# Altium PCB PCB1.PcbDoc
Units mm, origin at the board's own origin, x right, y up, seen from the top; angles counter-clockwise.
Board outline 55.5 x 62.48 mm, 2 copper layers (Top Layer, Bottom Layer); 13 components, 14 nets, 72 pads, 0 vias.
Unrouted connection lines stored in the file: 2.
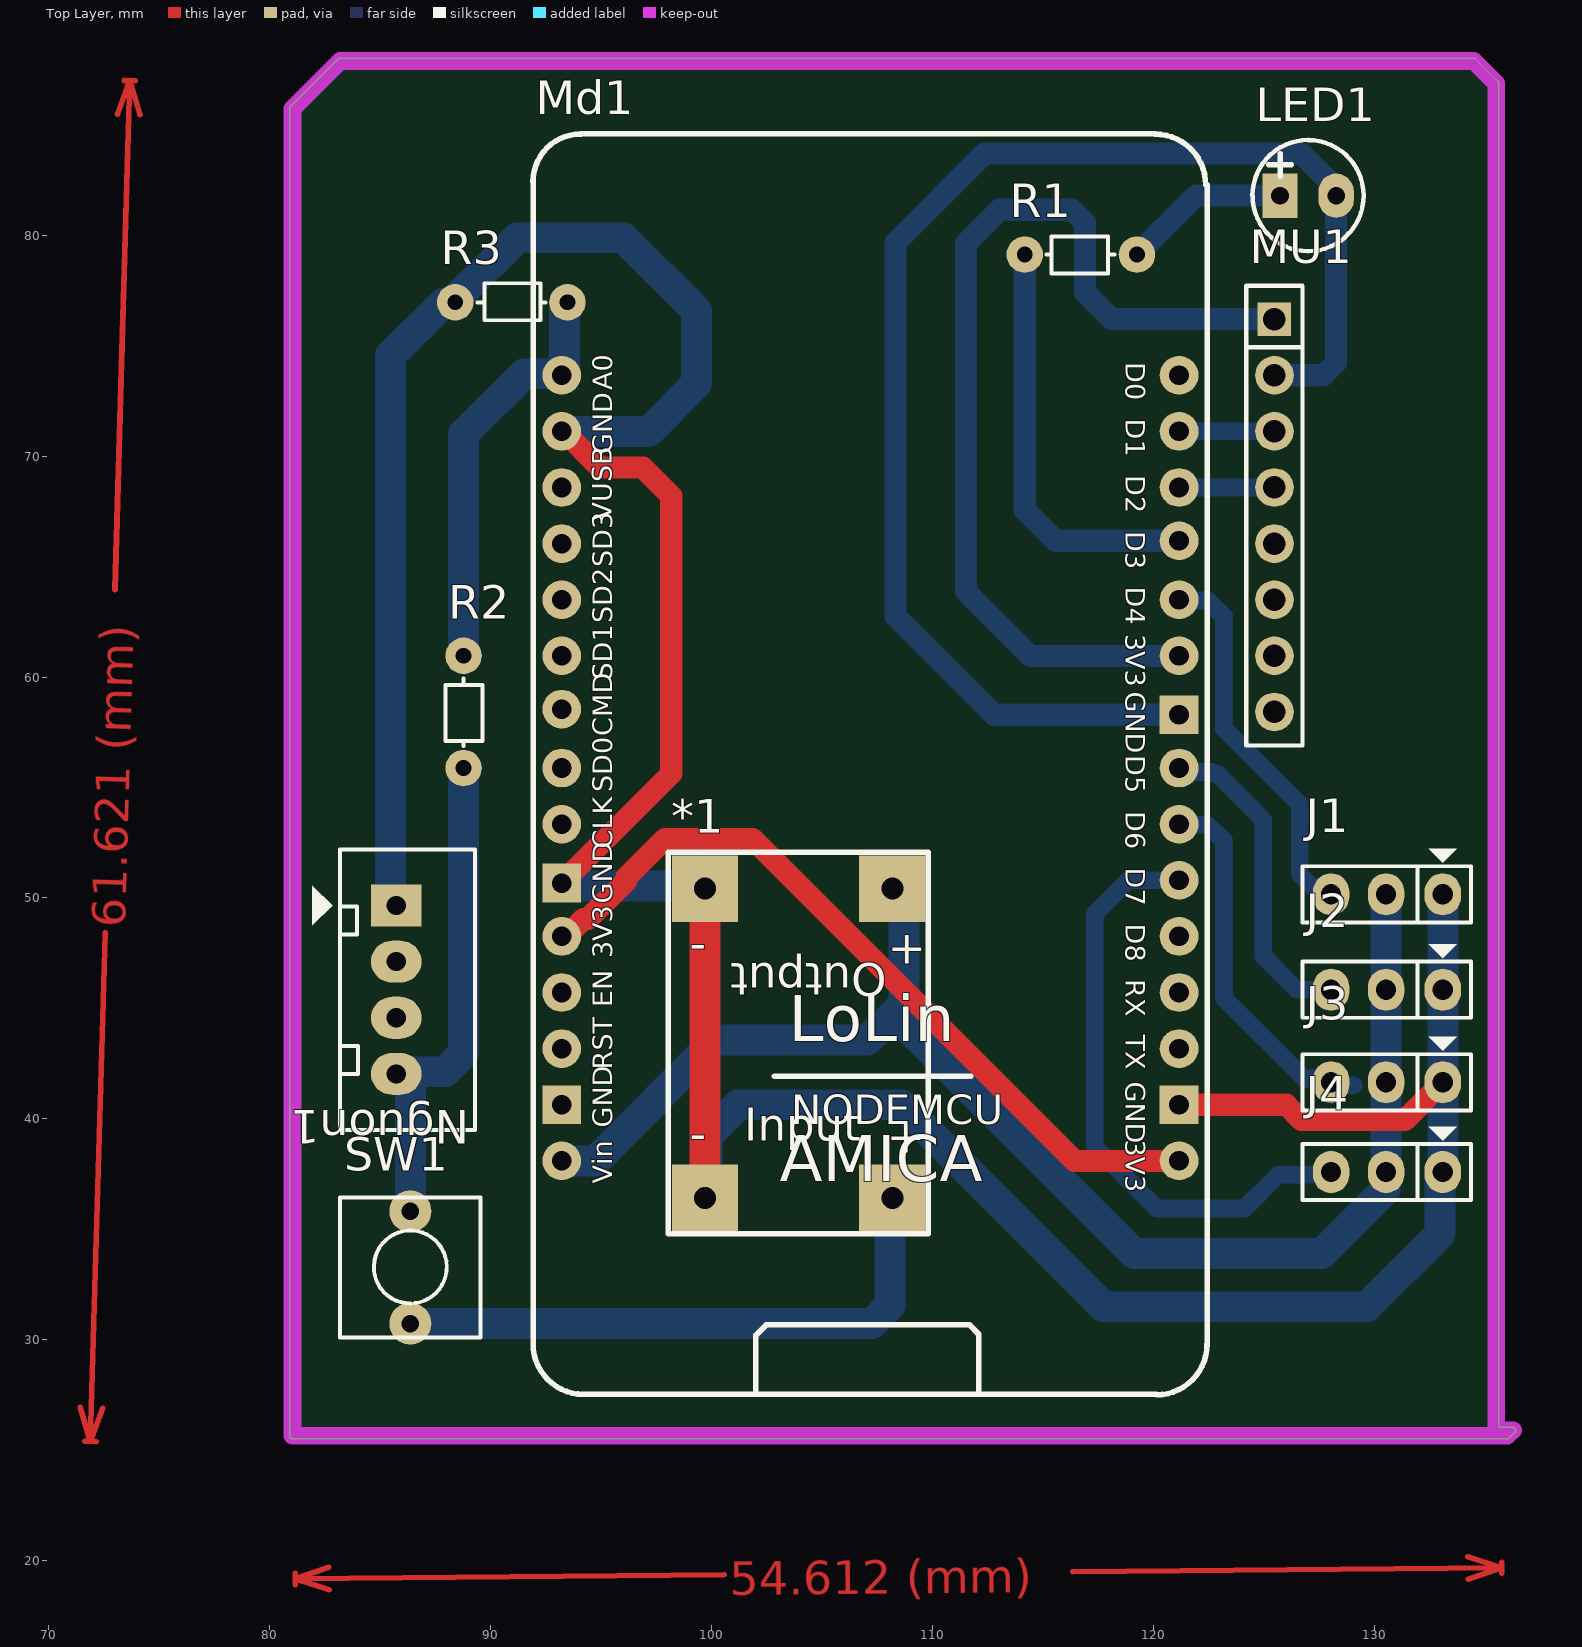
[diagram p0: Top Layer view]
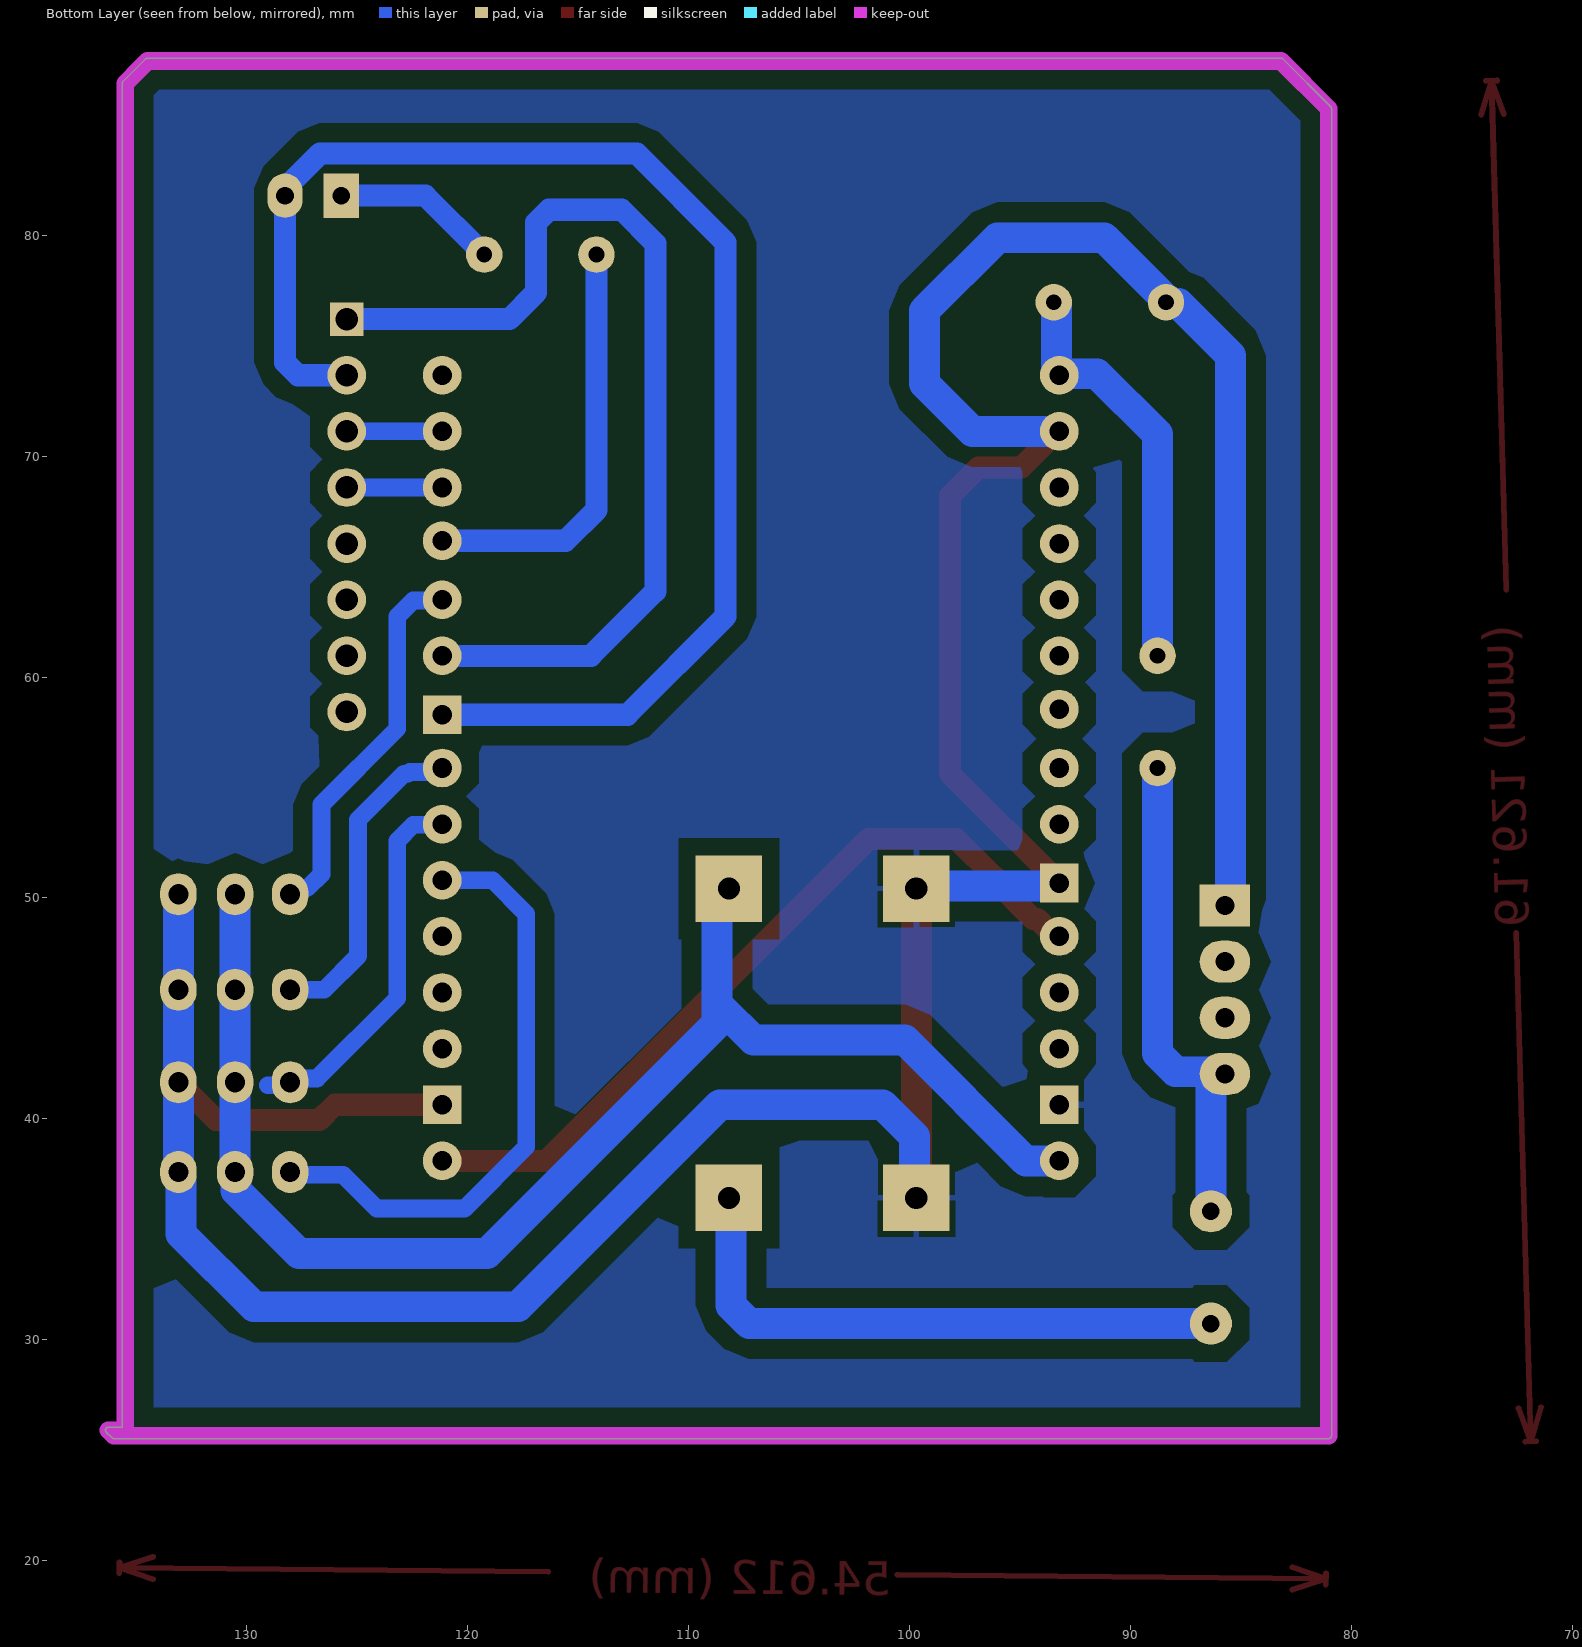
[diagram p1: Bottom Layer view, seen from below]
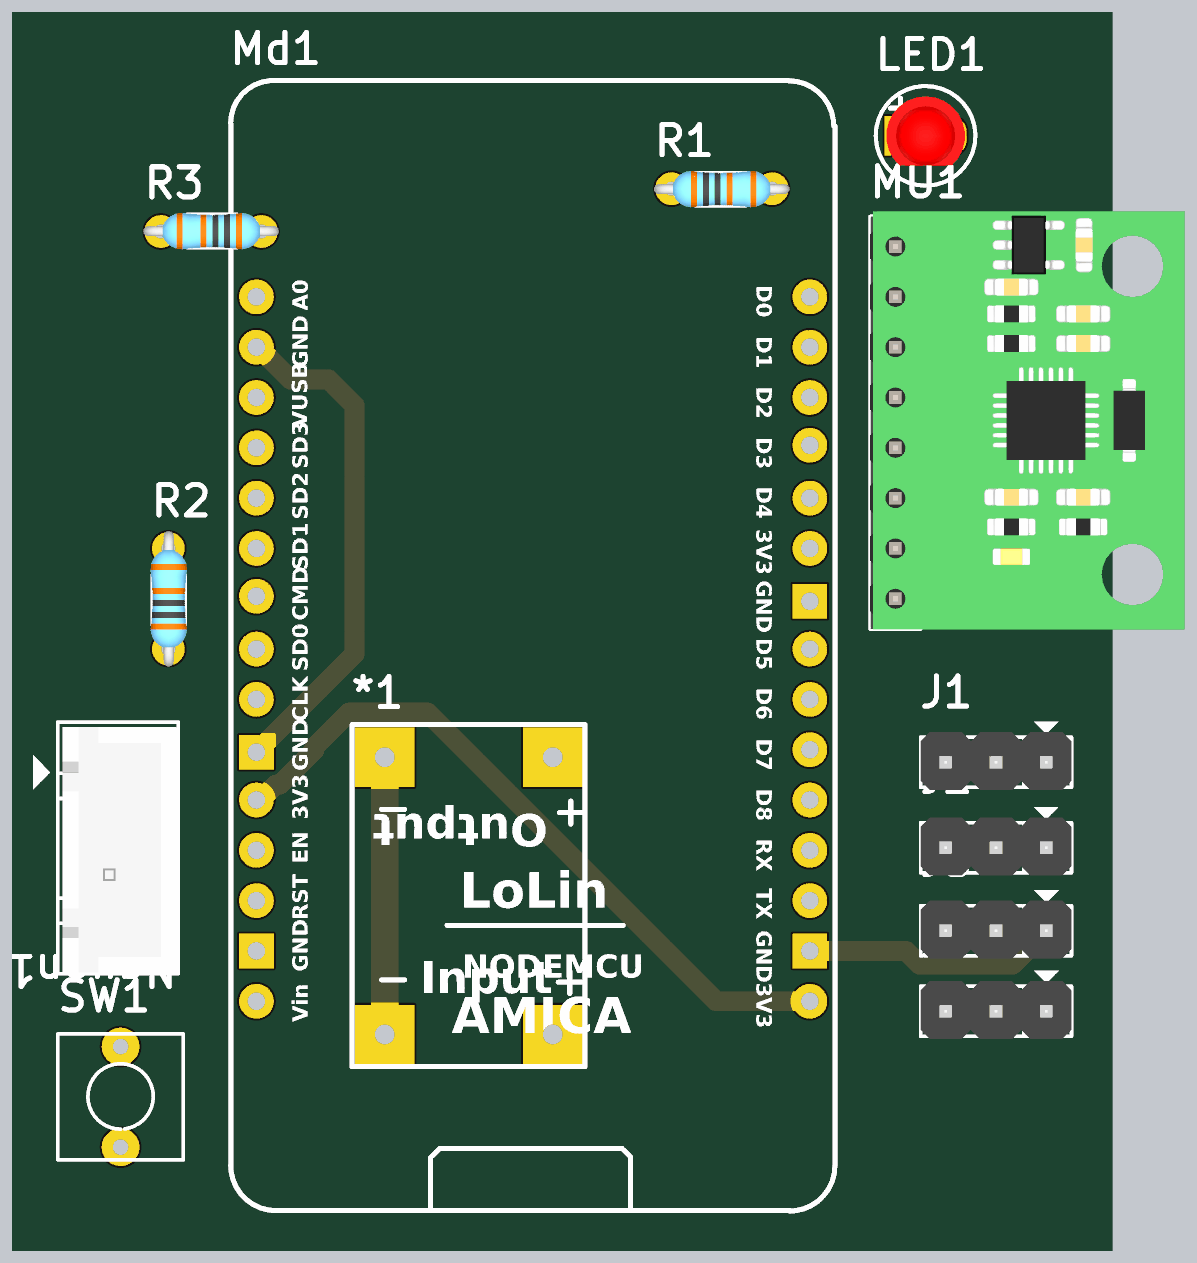
[diagram p2: 3D render of the assembled board from above, using the file's embedded part models]

## Layer stack, top to bottom
Top Solder: solder mask 0.0102, Solder Resist, Dk 3.5
Top Layer: signal copper 0.0356
Dielectric 1: dielectric 0.32, FR-4, Dk 4.8
Bottom Layer: signal copper 0.0356
Bottom Solder: solder mask 0.0102, Solder Resist, Dk 3.5

## Board outline
80.899,25.654 80.899,85.725 cw(c81.026,85.725) 80.936,85.816 80.936,85.815 83.095,87.974 83.094,87.974 cw(c83.185,87.884) 83.185,88.011 134.493,88.011 cw(c134.493,87.884) 134.584,87.974 134.583,87.974 135.599,86.958 135.599,86.959 cw(c135.509,86.868) 135.636,86.868 135.636,26.035 136.271,26.035 cw(c136.271,25.908) 136.398,25.908 cw(c136.271,25.908) 136.361,25.817 136.361,25.818 136.107,25.564 136.108,25.564 cw(c136.017,25.654) 136.017,25.527 81.026,25.527 cw(c81.026,25.654)

## Design rules (kind name [scope] priority, off if disabled: settings)
Clearance [All] p1: gap=0.8 ignorepadtopadclearanceinfootprint=FALSE
PolygonConnect [All] p1: connectstyle=Relief reliefconductorwidth=0.254 reliefentries=4 polygonreliefangle="90 Angle" airgapwidth=0.254
RoutingVias [All] p1: holewidth=0.711 width=1.27 viastyle="Through Hole" minholewidth=0.711 minwidth=1.27 maxholewidth=0.711 maxwidth=1.27
SolderMaskExpansion [All] p1: expansion=0.102 istentingtop=FALSE
Width [All] p1: maxlimit=1.5 minlimit=0.7 preferedwidth=1
30 further rules are at their usual default settings.

## Classes and differential pairs
component class Sheet2: *1 J1 J2 J3 J4 LED1 Md1 Nguon1 R1 R2 R3 SW1

## Components (designator, comment, footprint, x,y, rotation, side; value= is the part's Value field where it differs from the comment)
*1 "Mini-360 DC-DC" Mini-360 103.835,42.954 r0 top
J1 "Jumper 3" JP3 130.556,50.165 r180 top value=J3
J2 "Jumper 3" JP3 130.556,45.847 r180 top value=J3
J3 "Jumper 3" JP3 130.556,41.656 r180 top value=J3
J4 "Jumper 3" JP3 130.556,37.592 r180 top value=J3
LED1 "LED3" LED3mm 127,81.788 r0 top
Md1 "Node MCU 8266" NODEMCU_ESP8266_CH340 93.218,73.66 r0 top
MU1 "MPU6050" MPU6050 132.969,70.612 r270 top
Nguon1 "JP4" CON4 85.725,49.657 r270 top value="Connector 4"
R1 "47k" R1/8W 116.713,79.121 r180 top value="R1/4W - 1K"
R2 "47k" R1/8W 88.773,58.42 r270 top value="R1/4W - 1K"
R3 "10k" R1/8W 90.932,76.962 r0 top value="R1/4W - 1K"
SW1 "SW" SW2 86.36,35.814 r270 top value="SW chip 2 pin"

## Footprints (in the part's own frame and the unit in brackets; to place one, negate y for a bottom-side part, rotate by r counter-clockwise, add the part's x,y. Pads: shape width x height; smd on the part's side, far side on the other; paste and mask are expansions set on the pad)
CON4 [mil] "CON4"
  rect 75x90 hole 34: 1(0,0)
  oval 75x90 hole 34: 2(100,0) 3(200,0) 4(300,0)
  silkscreen extent -100,-150 400,140, body extent -90,-90 398,136, height 276
JP3 [mil] "Jumper 3"
  oval 65x75 hole 36: 1(-100,0) 2(1,0) 3(99,0)
  silkscreen extent -150,-81 150,50, body extent -150,-60 150,55, height 355
LED3mm [mm]
  rect 1.6x2 hole 0.8: 1(-1.27,0)
  oval 1.6x2 hole 0.8: 2(1.27,0)
  silkscreen extent -2.52,-2.51 2.51,2.52, body extent -1.99,-1.5 1.99,1.99, height 5.38
Mini-360 [mm] "DC-DC Power source"
  rect 3x3 hole 1: 1(-4.14,-6.53) 1(-4.14,-6.53) 2(4.344,-6.53) 2(4.344,-6.53) 3(-4.14,7.465) 4(4.344,7.465)
  silkscreen extent -5.79,-8.16 5.97,9.12
MPU6050 [mm]
  rect 1.52x1.52 hole 1.02: 1(-5.588,-7.493)
  round 0 all layers, no hole: 2(-4.572,4.445) 2(10.922,4.572)
  round 1.75 hole 1.02: 2(-3.048,-7.493) 3(-0.508,-7.493) 4(2.032,-7.493) 5(4.572,-7.493) 6(7.112,-7.493) 7(9.652,-7.493) 8(12.192,-7.493)
  silkscreen extent -7.11,-8.76 13.71,-6.22, body extent -7.37,-8.76 13.74,7.11, height 14.54
NODEMCU_ESP8266_CH340 [mil] "NODEMCU_ESP8266_CH340"
  round 69 hole 35: 3V3(0,-1000) 3V3(1100,-1400) 3V3(1100,-500) A0(0,0) CLK(0,-800) CMD(0,-595) D0(1100,0) D1(1100,-100) D2(1100,-200) D3(1100,-295) D4(1100,-400) D5(1100,-700) D6(1100,-800) D7(1100,-900) D8(1100,-1000) EN(0,-1100) GND(0,-100) RST(0,-1200) RX(1100,-1100) SD0(0,-700) SD1(0,-500) SD2(0,-400) SD3(0,-300) TX(1100,-1200) VIN(0,-1400) VUSB(0,-200)
  rect 69x69 hole 35: GND(0,-1300) GND(0,-905) GND(1100,-1300) GND(1100,-605)
  silkscreen extent -51,-1817 1150,430
R1/8W [mil] "R 1/8W, 2 pin, 200mil"
  round 65 hole 28: 1(-100,0) 2(100,0)
  silkscreen extent -60,-32 61,34, body extent -135,-35 135,37, height 86
SW2 [mil] "SW button 2pin, 250x 250 mil"
  round 75 hole 31: 1(0,0) 2(200,0)
  silkscreen extent -25,-125 225,125

## Part data
J1 J2 J3 J4: library part JP3
LED1: library part "LED 3mm", "LED 3mm"
Md1: library part NodeMCU_ESP8266
MU1: Manufacturer="W¨¹rth Elektronik eiSos GmbH", partNo=613004143121, ComponentLink1 Description=Manufacturer, ComponentLink1URL=http://www.we-online.com, ComponentLink2 Description=Datasheet, ComponentLink2URL=http://katalog.we-online.de/em/datasheet/6130xx143121.pdf, Created by="Karrer Zheng", Created Date="29 March 2013", NoPins=04
Nguon1: library part Con4, "Connector 4"
R1 R2 R3: library part R, "Resistor 1/4W"
SW1: library part SW2, "Switch button 2 pin"

## Nets (pads, with @x,y where several pads share a name; then routed paths per layer and width w, separated by ;. In a path a pad name is that pad's centre, name@x,y a point inside that pad or via, vN(x,y) a via of type N, cw(c..) or ccw(c..) an arc to the next point about the centre after c; other vN are vias at no path point)
+5: *1.4 J1.2 J2.2 J3.2 J4.2 Md1.VIN | length 65.2
  Bottom Layer w1.4: Md1.VIN 94.742,38.1 100.203,43.561 107.061,43.561 108.458,44.958 ; *1.4 108.712,49.886 108.712,44.323 119.126,33.909 127.635,33.909 130.483,36.757 130.483,37.544 J4.2 ; J4.2@130.531,37.438 J3.2 J2.2 J1.2
+12: Nguon1.4 R2.2 SW1.1 | length 21.4
  Bottom Layer w1.4: Nguon1.4 85.822,42.134 87.953,42.134 88.773,42.954 R2.2@88.773,55.304 ; SW1.1 Nguon1.4@86.36,41.402
esc1: J1.3 Md1.D4 | length 17.2
  Bottom Layer w0.8: Md1.D4 121.191,63.467 122.461,63.467 123.19,62.738 123.19,57.658 126.619,54.229 126.619,51.071 127.236,50.455 127.752,50.455 J1.3
esc2: J2.3 Md1.D5 | length 14.7
  Bottom Layer w0.8: Md1.D5 121.34,55.698 122.628,55.698 122.701,55.624 122.882,55.624 124.968,53.538 124.968,47.371 126.492,45.847 J2.3
esc3: J3.3 Md1.D6 | length 17
  Bottom Layer w0.8: Md1.D6 121.191,53.307 122.461,53.307 123.19,52.578 123.19,45.466 126.825,41.831 127.739,41.831 128.041,41.529 129.051,41.529
esc4: J4.3 Md1.D7 | length 27.5
  Bottom Layer w0.8: Md1.D7 118.872,50.8 117.348,49.276 117.348,38.735 120.142,35.941 124.118,35.941 125.642,37.465 127.914,37.465 J4.3
GND: *1.1 *1.3 J1.1 J2.1 J3.1 J4.1 LED1.2 Md1.GND MU1.2 Nguon1.1 R3.1 | length 233.9
  Top Layer w1: Md1.GND@93.218,50.673 98.171,55.626 98.171,68.199 96.885,69.485 94.944,69.485 93.309,71.12 Md1.GND@93.218,71.12 ; Md1.GND@121.158,40.64 126.014,40.64 126.705,39.949 131.387,39.949 133.093,41.656 J3.1
  Top Layer w1.4: *1.1@99.695,36.424 *1.3
  Bottom Layer w1: Md1.GND@121.158,58.293 112.776,58.293 108.331,62.738 108.331,79.674 112.35,83.693 126.691,83.693 128.27,82.114 128.27,74.246 127.684,73.66 MU1.2@125.476,73.66
  Bottom Layer w1.4: Nguon1.1 85.723,49.657 85.471,49.909 85.471,74.549 87.836,76.914 88.149,76.914 R3.1@88.283,77.047 ; R3.1 88.392,77.03 88.517,77.155 88.517,77.214 91.186,79.883 96.012,79.883 99.314,76.581 99.314,73.279 97.155,71.12 Md1.GND@93.218,71.12 ; Md1.GND@93.218,50.673 93.345,50.546 99.568,50.546 *1.3 ; *1.1@99.695,36.424 99.782,36.511 99.782,39.203 101.219,40.64 108.585,40.64 117.729,31.496 129.667,31.496 132.969,34.798 132.969,37.27 133.096,37.397 J4.1 J3.1 J2.1 J1.1
led: Md1.D3 R1.2 | length 19.1
  Bottom Layer w1: R1.2 114.173,67.564 115.57,66.167 Md1.D3
Net*1_2: *1.2 SW1.2 | length 27.2
  Bottom Layer w1.4: SW1.2 107.257,30.734 108.077,31.554 *1.2@108.077,36.712
NetLED1_1: LED1.1 R1.1 | length 7.6
  Bottom Layer w1: R1.1 121.92,81.788 LED1.1
NetMd1_A0: Md1.A0 R2.1 R3.2 | length 19
  Bottom Layer w1.4: R2.1 88.773,70.993 91.507,73.727 93.151,73.727 Md1.A0 93.285,73.727 93.285,73.977 93.345,74.036 93.345,76.767 93.472,76.894 R3.2
scl: Md1.D1 MU1.3 | length 4.5
  Bottom Layer w0.8: Md1.D1 MU1.3
  Bottom Layer w1.1: Md1.D1 Md1.D1@121.283,70.995
sda: Md1.D2 MU1.4 | length 4.5
  Bottom Layer w0.8: Md1.D2 MU1.4
  Bottom Layer w1.1: Md1.D2 Md1.D2@121.283,68.455
VCC: Md1.3V3 MU1.1 | length 81
  Top Layer w1: Md1.3V3@93.218,48.26 93.422,48.26 94.204,49.043 94.407,49.043 96.145,50.781 96.145,50.935 97.883,52.673 101.858,52.673 116.431,38.1 Md1.3V3@121.158,38.1
  Bottom Layer w1: Md1.3V3@121.158,60.96 114.427,60.96 111.506,63.881 111.506,79.629 113.03,81.153 116.317,81.153 116.903,80.567 116.903,77.407 118.11,76.2 MU1.1
pads on no net: Md1.CLK Md1.CMD Md1.D0 Md1.D8 Md1.EN Md1.RST Md1.RX Md1.SD0 Md1.SD1 Md1.SD2 Md1.SD3 Md1.TX Md1.VUSB MU1.5 MU1.6 MU1.7 MU1.8 Nguon1.2 Nguon1.3
copper on no net: | length 99.8
  Top Layer w0.254: 71.418,26.938 71.882,25.4 ; 71.628,25.407 72.136,25.393 ; 72.434,26.909 71.882,25.4 ; 72.547,48.431 71.882,25.4 ; 72.995,63.964 73.66,86.995 ; 73.108,85.486 73.66,86.995 ; 73.406,87.002 73.914,86.988 ; 74.124,85.457 73.66,86.995 ; 81.151,19.431 81.155,18.923 ; 82.672,19.699 81.153,19.177 ; 82.682,18.683 81.153,19.177 ; 100.561,19.358 81.153,19.177 ; 116.355,19.504 135.763,19.685 ; 134.234,20.179 135.763,19.685 ; 134.244,19.163 135.763,19.685 ; 135.761,19.939 135.765,19.431

## Polygon pours and split planes (outlines as drawn)
GND on Bottom Layer "GND_L02_P000" (solid, remove dead copper, pour order 0): 80.645,88.265 80.899,88.519 135.636,88.519 135.636,25.654 135.382,25.4 135.001,25.781 80.264,25.781

## Keep-outs
Keep-Out Layer:
  lines w0.8: 81.026,25.654 136.017,25.654 136.271,25.908 135.509,25.908 135.509,86.868 134.81,87.566 135.255,87.122 134.493,87.884 83.185,87.884 81.026,85.725 81.026,25.654

## Other copper
Top Layer:
  text "61.621 (mm)" at 73.468,48.658 h1.52 r88.35
  text "54.612 (mm)" at 100.824,18.446 h1.52 r0.53

## Text inside footprints (layer, text, board x,y; h text height)
*1: Top Overlay "-" at 99.008,38.586 h1.52; Top Overlay "Input" at 101.473,38.506 h2.54; Top Overlay "Output" at 107.925,47.549 h2.54 r180; Top Overlay "+" at 107.926,38.471 h1.52; Top Overlay "+" at 107.976,47.031 h1.52; Top Overlay "-" at 99.008,47.197 h1.52
Md1: Top Overlay "LoLin" at 103.48,42.824 h3.56; Top Overlay "AMICA" at 103.073,36.5 h3.56; Top Overlay "NODEMCU" at 103.607,39.294 h2.29; Top Overlay "CLK" at 95.807,52.222 h1.52 r90; Top Overlay "SD0" at 95.807,54.773 h1.52 r90; Top Overlay "SD1" at 95.807,59.875 h1.52 r90; Top Overlay "SD2" at 95.807,62.426 h1.52 r90; Top Overlay "SD3" at 95.807,64.977 h1.52 r90; Top Overlay "VUSB" at 95.781,67.081 h1.52 r90; Top Overlay "GND" at 95.807,70.079 h1.52 r90; Top Overlay "A0" at 95.807,72.974 h1.52 r90; Top Overlay "D5" at 118.461,56.448 h1.52 r270; Top Overlay "GND" at 118.461,59.344 h1.52 r270; Top Overlay "3V3" at 118.461,61.935 h1.52 r270; Top Overlay "D4" at 118.461,64.094 h1.52 r270; Top Overlay "D3" at 118.461,66.594 h1.52 r270; Top Overlay "D2" at 118.461,69.134 h1.52 r270; Top Overlay "D1" at 118.461,71.68 h1.52 r270; Top Overlay "D0" at 118.461,74.254 h1.52 r270; Top Overlay "CMD" at 95.807,57.324 h1.52 r90; Top Overlay "D6" at 118.461,53.931 h1.52 r270; Top Overlay "3V3" at 118.461,39.049 h1.52 r270; Top Overlay "GND" at 118.461,41.686 h1.52 r270; Top Overlay "TX" at 118.461,43.799 h1.52 r270; Top Overlay "RX" at 118.461,46.312 h1.52 r270; Top Overlay "D8" at 118.461,48.826 h1.52 r270; Top Overlay "D7" at 118.461,51.363 h1.52 r270; Top Overlay "Vin" at 95.807,37.059 h1.52 r90; Top Overlay "GND" at 95.807,39.599 h1.52 r90; Top Overlay "RST" at 95.807,42.215 h1.52 r90; Top Overlay "EN" at 95.807,45.06 h1.52 r90; Top Overlay "3V3" at 95.807,47.269 h1.52 r90; Top Overlay "GND" at 95.807,49.733 h1.52 r90